# Altium PCB ElectromagneticPositioning.PcbDoc (part 2 of 3)
Units mm, origin at the board's own origin, x right, y up, seen from the top; angles counter-clockwise.
Board outline 163.96 x 78.23 mm, 2 copper layers (Top Layer, Bottom Layer); 269 components, 166 nets, 989 pads, 249 vias.
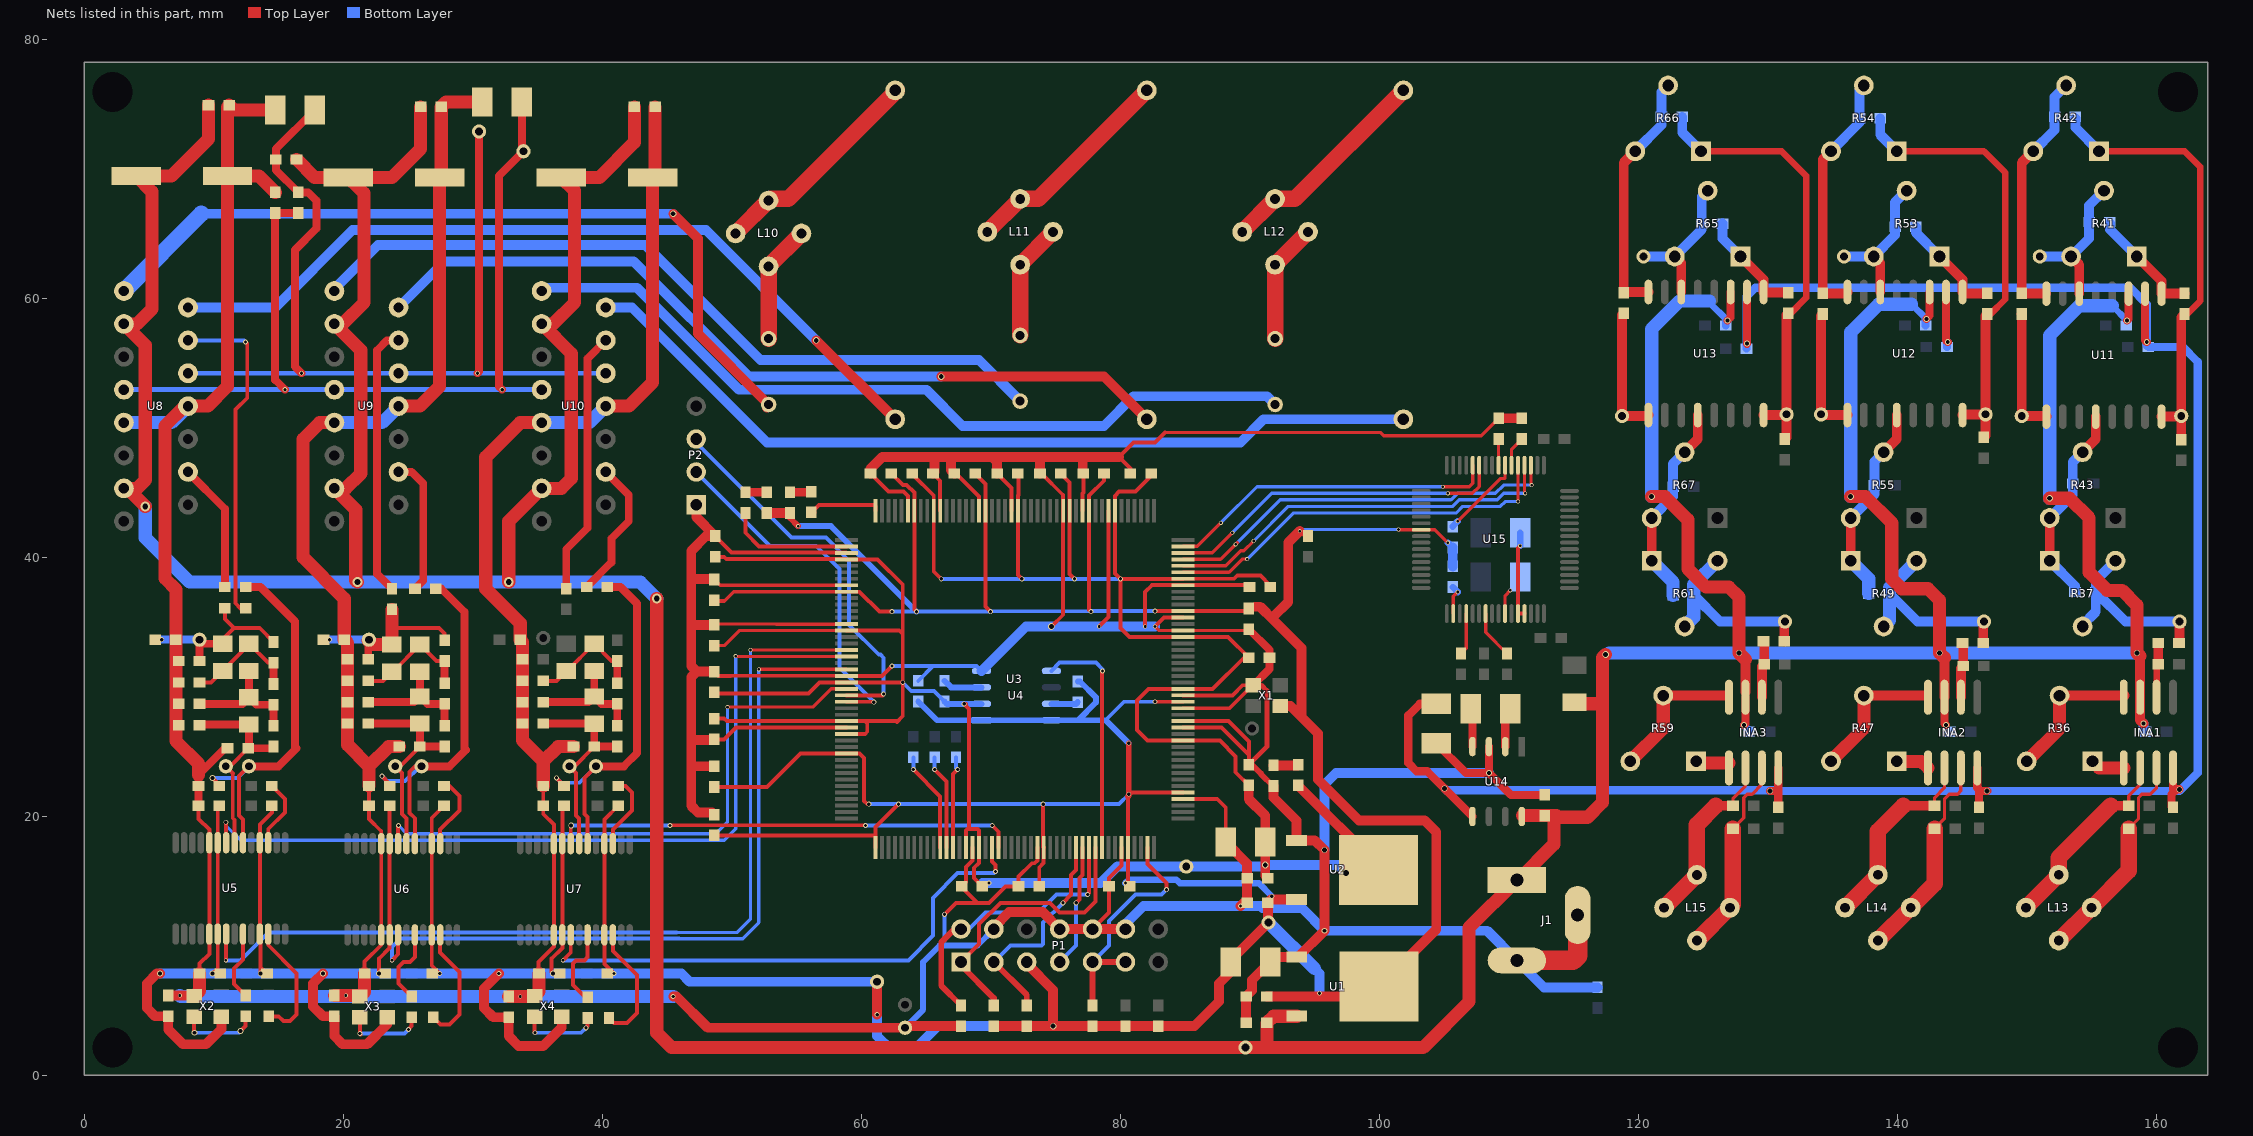
[diagram p2: the nets of this part, all layers, seen from the top]

## Via types
v1: diameter 0.305, hole 0.203, Top Layer to Bottom Layer, 111 vias
v2: diameter 0.381, hole 0.254, Top Layer to Bottom Layer, 76 vias
v3: diameter 0.457, hole 0.305, Top Layer to Bottom Layer, 34 vias
v4: diameter 0.508, hole 0.381, Top Layer to Bottom Layer, 14 vias
v5: diameter 0.457, hole 0.381, Top Layer to Bottom Layer, 8 vias
v6: diameter 0.762, hole 0.457, Top Layer to Bottom Layer, 4 vias
v7: diameter 0.508, hole 0.457, Top Layer to Bottom Layer, 1 vias
v8: diameter 0.559, hole 0.381, Top Layer to Bottom Layer, 1 vias

## Nets (pads, with @x,y where several pads share a name; then routed paths per layer and width w, separated by ;. In a path a pad name is that pad's centre, name@x,y a point inside that pad or via, vN(x,y) a via of type N, cw(c..) or ccw(c..) an arc to the next point about the centre after c; other vN are vias at no path point) (continued)
GND: C1.1 C2.1 C3.2 C4.1 C5.1 C6.2 C7.1 C8.1 C9.1 C10.1 C11.1 C12.1 C13.1 C14.1 C15.1 C16.1 C17.1 C18.1 C19.1 C20.1 C21.1 C22.1 C23.1 C24.1 C25.1 C26.1 C27.1 C30.1 C31.1 C36.1 C37.1 C40.1 C41.1 C42.1 C43.1 C44.1 C49.1 C50.1 C53.1 C54.1 C55.1 C56.1 C57.2 C62.1 C63.1 C66.1 C67.1 C68.1 C69.1 C71.1 C74.2 C78.1 C79.2 C80.2 C81.2 C84.1 C87.2 C112.2 C123.1 D1.2 J1.2 J1.3 P1.4 P1.8 P1.10 P1.12 P2.1 R2.2 R13.1 R15.2 R17.1 R18.1 R20.2 R22.1 R23.1 R25.2 R27.1 R28.1 R31.1 R71.1 R73.1 TP4.1 U1.1 U2.1 U3.3 U3.8 U3.14 U3.22 U3.30 U3.60 U3.70 U3.83 U3.92 U3.103 U3.104 U3.106 U3.108 U3.118 U3.120 U3.125 U3.140 U3.144 U3.147 U3.155 U3.160 U3.166 U3.171 U4.4 U5.5 U5.24 U6.5 U6.24 U7.5 U7.24 U8.8 U8.9 U9.8 U9.9 U10.8 U10.9 U14.3 X1.2 X2.2 X3.2 X4.2 | length 771.5
  Top Layer w0.254: C13.1@48.641,34.798 48.703,34.86 53.393,34.86 53.405,34.849 58.825,34.849 U3.14@58.836,34.86 ; C23.1@48.641,38.303 49.084,37.86 U3.8@58.836,37.86 ; 49.91,30.86 U3.22@58.836,30.86 ; v1(82.677,34.671) 82.988,34.36 U3.118@84.836,34.36 89.808,34.36 C19.1@89.916,34.468 ; 83.439,49.657 100.076,49.657 100.33,49.403 107.874,49.403 R73.1@109.22,50.749
  Top Layer w0.305: X2.2@8.437,6.172 X2.2@8.475,6.134 ; C36.1@8.814,20.828 8.814,19.812 9.644,18.982 U5.24@9.644,17.972 9.644,9.39 ; C37.1@8.89,7.874 8.89,8.636 9.644,9.39 ; U5.5@9.644,10.922 9.644,9.39 ; C50.1@21.641,7.874 21.641,8.814 22.92,10.093 U6.5@22.92,10.857 U6.24@22.92,17.907 22.92,18.863 21.971,19.812 C49.1@21.971,20.828 R20.2@21.971,22.352 ; C63.1@35.103,7.874 35.052,7.925 35.052,8.763 36.255,9.966 U7.5@36.255,10.857 U7.24@36.255,17.907 36.255,19.371 35.433,20.193 C62.1@35.433,20.828 R25.2@35.433,22.352 ; C11.1@48.641,25.959 49.403,25.959 50.304,26.86 U3.30@58.836,26.86 ; C12.1@48.641,31.191 48.971,30.861 49.911,30.861 49.91,30.86 ; C14.1@48.704,41.656 49.983,40.377 58.819,40.377 U3.3@58.836,40.36 ; U3.22@58.836,30.86 61.594,30.86 v2(62.357,31.623) ; C27.1@60.706,46.482 62.103,45.085 63.246,45.085 63.586,44.745 U3.171@63.586,43.61 ; C18.1@65.532,46.482 66.086,45.928 U3.166@66.086,43.61 ; v2(66.421,12.446) 67.31,13.335 68.961,13.335 ; C26.1@67.183,46.482 67.183,46.355 67.434,46.355 69.086,44.703 U3.160@69.086,43.61 ; U3.60@68.586,17.61 68.569,17.593 68.569,16.587 68.072,16.09 68.072,14.935 C10.1@67.742,14.605 67.742,14.554 68.961,13.335 ; C17.1@70.485,46.482 71.586,45.381 U3.155@71.586,43.61 ; U3.70@73.586,17.61 73.586,16.604 73.373,16.391 73.16,16.391 72.136,15.367 C22.1@72.136,14.605 71.12,14.605 69.85,13.335 68.961,13.335 ; C16.1@73.787,46.482 73.914,46.482 75.586,44.81 U3.147@75.586,43.61 75.586,35.581 v4(74.676,34.671) ; U3.144@77.086,43.61 77.086,44.955 77.14,45.009 C25.1@77.14,46.482 ; P1.10@77.851,11.303 79.121,12.573 C24.1@79.121,14.605 79.121,15.24 80.086,16.205 U3.83@80.086,17.61 ; v1(78.359,34.671) 79.086,35.398 U3.140@79.086,43.61 ; C15.1@80.772,46.482 80.772,46.863 79.883,47.752 81.026,48.895 82.677,48.895 83.439,49.657 ; v1(81.915,34.671) 81.915,37.338 82.437,37.86 U3.125@84.836,37.86 89.826,37.86 C9.1@89.967,37.719 ; v1(82.677,34.671) 83.366,35.36 U3.120@84.836,35.36 ; U3.92@84.836,21.36 87.479,21.36 88.136,20.703 C6.2@88.136,18.034 ; U3.103@84.836,26.86 87.821,26.86 89.916,24.765 ; U3.104@84.836,27.36 88.337,27.36 89.916,25.781 89.916,24.765 ; U3.106@84.836,28.36 88.431,28.36 X1.2@90.208,30.137 ; U3.108@84.836,29.36 88.666,29.36 89.443,30.137 X1.2@90.208,30.137 ; C8.1@89.916,24.003 89.916,24.765 ; X1.2@90.263,30.137 X1.2@90.208,30.137
  Top Layer w0.381: C8.1@89.916,24.003 91.313,25.4 91.313,29.718 90.894,30.137 X1.2@90.263,30.137
  Top Layer w0.457: C8.1@89.916,24.003 90.17,24.003 90.862,23.311 90.862,23.271 91.781,22.352 D1.2@91.821,22.352
  Top Layer w0.61: C36.1@8.814,20.828 R15.2@8.814,22.352 8.814,23.228 10.859,25.273 R17.1@11.049,25.273 ; C19.1@89.916,34.468 91.516,32.868 C7.1@91.516,32.258 91.516,31.39 X1.2@90.263,30.137
  Top Layer w0.635: C123.1@104.394,25.654 106.68,23.368 v3(108.458,23.368) ; U14.3@108.458,25.4 v3(108.458,23.368) ; C112.2@112.776,21.666 110.16,21.666 v3(108.458,23.368)
  Top Layer w0.762: C31.1@6.477,6.172 v1(7.366,6.172) X2.2@8.437,6.172 ; v2(45.466,6.096) 45.72,6.096 48.133,3.683 TP4.1@63.373,3.683 63.5,3.81 R13.1@67.691,3.81 ; P2.1@47.244,44.069 47.244,43.116 C14.1@48.704,41.656 48.006,41.656 46.863,40.513 46.863,38.354 ; C20.1@48.641,20.142 48.463,20.32 47.371,20.32 46.863,20.828 46.863,24.003 ; C21.1@48.641,23.876 46.99,23.876 46.863,24.003 ; C11.1@48.641,25.959 48.59,25.908 46.863,25.908 ; C12.1@48.641,31.191 47.295,31.191 ; C13.1@48.641,34.798 46.863,34.798 ; C23.1@48.641,38.303 48.59,38.354 46.863,38.354 ; C27.1@60.706,46.482 60.706,46.85 61.608,47.752 65.659,47.752 ; C18.1@65.532,46.482 65.659,46.609 65.659,47.752 ; C26.1@67.183,46.482 66.929,46.736 66.929,47.752 ; P1.4@70.231,11.303 70.231,11.43 71.413,12.612 74.002,12.612 P1.8@75.311,11.303 P1.10@77.851,11.303 P1.12@80.391,11.303 P1.12@80.569,11.481 ; C17.1@70.485,46.482 70.485,47.371 70.104,47.752 ; C16.1@73.787,46.482 73.787,47.752 ; C25.1@77.14,46.482 77.089,46.533 77.089,47.752 ; 79.883,47.752 77.089,47.752 ; C6.2@88.136,18.034 89.789,16.381 C5.1@89.789,15.24 C4.1@89.789,13.335 89.535,13.335 v2(89.281,13.081) ; C1.1@89.713,4.064 C2.1@89.713,6.096 90.17,6.553 90.17,7.366 C3.2@91.567,8.763 91.942,9.138 U1.1@93.617,9.138 93.72,9.138 v3(95.758,11.176) v5(95.758,17.399) 94.996,18.161 94.984,18.149 U2.1@93.599,18.149 93.599,19.685 91.821,21.463 D1.2@91.821,22.352 ; R73.1@109.22,50.749 R71.1@110.998,50.749 ; 46.863,24.003 46.863,25.908 ; 46.863,25.908 46.863,30.759 47.295,31.191 ; 46.863,34.798 46.863,31.623 47.295,31.191 ; 46.863,34.798 46.863,38.354 ; 65.659,47.752 66.929,47.752 ; 66.929,47.752 70.104,47.752 ; 70.104,47.752 73.787,47.752 ; 73.787,47.752 77.089,47.752
  Top Layer w1.016: X2.2@8.475,6.134 8.89,6.549 C37.1@8.89,7.874 ; 8.814,23.228 8.814,24.079 7.061,25.832 R18.1@7.061,33.655 7.061,37.541 6.223,38.379 6.223,50.165 7.747,51.689 U8.8@8.001,51.689 9.525,51.689 11.049,53.213 C74.2@11.049,69.469 ; C80.2@14.73,74.549 11.557,74.549 C71.1@11.176,74.93 11.049,74.803 C74.2@11.049,69.469 ; R31.1@14.732,68.199 13.462,69.469 C74.2@11.049,69.469 ; C44.1@19.304,6.172 v1(20.193,6.172) 21.192,6.172 X3.2@21.268,6.096 21.641,6.469 C50.1@21.641,7.874 ; U9.9@19.304,50.419 18.161,50.419 16.891,49.149 16.891,40.005 20.066,36.83 R23.1@20.066,33.655 20.32,33.401 C56.1@20.32,32.131 C55.1@20.32,30.48 C54.1@20.32,28.829 C53.1@20.32,27.178 20.32,25.527 21.971,23.876 ; R20.2@21.971,22.352 21.971,23.876 ; U9.8@24.257,51.689 25.908,51.689 27.432,53.213 C81.2@27.432,69.342 27.559,69.469 C78.1@27.559,74.803 27.94,75.184 C79.2@30.732,75.184 ; R22.1@24.308,25.4 23.495,25.4 21.971,23.876 ; C57.2@32.766,6.096 v1(33.655,6.096) 34.726,6.096 X4.2@34.764,6.134 35.103,6.473 C63.1@35.103,7.874 ; U10.9@35.306,50.419 33.655,50.419 30.988,47.752 30.988,37.592 33.655,34.925 R28.1@33.655,33.655 33.833,33.477 C69.1@33.833,32.131 C68.1@33.833,30.48 C67.1@33.833,28.829 C66.1@33.833,27.178 33.833,25.857 35.433,24.257 ; R25.2@35.433,22.352 35.433,24.257 ; R27.1@37.77,25.4 36.576,25.4 35.433,24.257 ; U10.8@40.259,51.689 42.037,51.689 43.881,53.533 C87.2@43.881,69.342 44.069,69.53 C84.1@44.069,74.803
  Top Layer w1.524: J1.2@110.617,8.89 114.935,8.89 115.317,9.272 J1.3@115.317,12.39
  Bottom Layer w0.305: v2(62.357,31.623) 65.532,31.623 ; C30.1@64.389,30.48 65.532,31.623 ; 66.04,10.033 66.421,10.414 v2(66.421,12.446) ; U4.4@69.276,31.242 68.895,31.623 65.532,31.623
  Bottom Layer w0.457: TP4.1@63.373,3.683 64.77,5.08 64.77,8.763 66.04,10.033 68.961,10.033 P1.4@70.231,11.303
  Bottom Layer w0.762: U4.4@69.276,31.242 72.705,34.671 v4(74.676,34.671) v1(78.359,34.671) v1(81.915,34.671) v1(82.677,34.671) ; P1.12@80.391,11.303 80.391,11.684 81.788,13.081 v2(89.281,13.081) 90.82,13.081 90.981,12.92 94.014,12.92 v3(95.758,11.176) 108.331,11.176 J1.2@110.617,8.89 112.7,6.807 R2.2@116.84,6.807 ; v5(95.758,17.399) 95.758,22.479 96.647,23.368 v3(108.458,23.368)
  Bottom Layer w1.016: U8.9@3.048,50.419 6.731,50.419 U8.8@8.001,51.689 ; v1(7.366,6.172) 7.442,6.096 v1(33.655,6.096) v2(45.466,6.096) ; U9.9@19.304,50.419 22.987,50.419 U9.8@24.257,51.689 ; U10.9@35.306,50.419 38.989,50.419 U10.8@40.259,51.689
GPIO_LED1: D3.2 U3.2 | length 9.7
  Top Layer w0.305: D3.2@51.054,43.434 51.054,41.91 52.104,40.86 U3.2@58.836,40.86
GPIO_LED2: D2.2 U3.176 | length 5.8
  Top Layer w0.305: D2.2@56.385,43.485 D2.2@56.134,43.485 56.718,44.069 60.96,44.069 61.086,43.943 U3.176@61.086,43.61
IN1_A: C70.2 U8.4 | length 26
  Top Layer w0.305: C70.2@12.446,36.068 12.065,36.068 11.666,36.467 11.666,51.417 12.573,52.324 12.573,56.515 v2(12.446,56.642)
  Bottom Layer w0.305: U8.4@8.001,56.769 12.319,56.769 v2(12.446,56.642)
IN1_B: C76.2 U9.4 | length 20.9
  Top Layer w0.61: C76.2@23.749,37.592 22.606,38.735 22.606,56.007 23.368,56.769 U9.4@24.257,56.769
IN1_C: C82.2 U10.4 | length 20.4
  Top Layer w0.61: C82.2@37.211,37.592 37.211,40.64 38.862,42.291 38.862,55.372 U10.4@40.259,56.769
IN2_A: C75.2 U8.12 | length 10.1
  Top Layer w0.61: U8.12@8.001,46.609 10.846,43.764 C75.2@10.846,37.719
IN2_B: C77.2 U9.12 | length 10.7
  Top Layer w0.61: U9.12@24.257,46.609 25.273,46.609 26.162,45.72 26.162,38.227 C77.2@25.527,37.592
IN2_C: C83.2 U10.12 | length 11
  Top Layer w0.61: C83.2@38.786,37.719 40.691,39.624 40.691,41.453 42.037,42.799 42.037,44.831 U10.12@40.259,46.609
L1_A: INA1.2 L13.2 R39.2 | length 15.3
  Top Layer w0.254: R39.2@157.861,20.828 157.861,21.59 158.75,22.479 INA1.2@158.75,23.749
  Top Layer w0.762: 156.464,20.828 R39.2@157.861,20.828
  Top Layer w1.27: L13.2@149.924,12.958 L13.2@152.464,15.498 152.464,16.828 156.464,20.828
L1_B: INA1.3 L13.1 R40.2 | length 17
  Top Layer w0.254: R40.2@157.861,19.05 158.623,19.812 158.623,21.463 158.877,21.717 159.512,21.717 160.02,22.225 INA1.3@160.02,23.749 INA1.3@160.14,23.629
  Top Layer w1.27: L13.1@152.464,10.418 L13.1@155.004,12.958 157.861,15.815 R40.2@157.861,19.05
L2_A: INA2.2 L14.2 R51.2 | length 15.4
  Top Layer w0.254: R51.2@142.875,20.828 142.875,21.463 143.637,22.225 INA2.2@143.637,23.749
  Top Layer w0.762: 140.462,20.828 R51.2@142.875,20.828
  Top Layer w1.27: L14.2@135.954,12.958 L14.2@138.494,15.498 138.494,18.86 140.462,20.828
L2_B: INA2.3 L14.1 R52.2 | length 16.4
  Top Layer w0.254: R52.2@142.875,19.05 143.637,19.812 143.637,21.336 144.018,21.717 144.653,21.717 144.907,21.971 INA2.3@144.907,23.749
  Top Layer w1.27: L14.1@138.494,10.418 L14.1@141.034,12.958 142.875,14.799 R52.2@142.875,19.05
L3_A: INA3.2 L15.2 R63.2 | length 14.2
  Top Layer w0.254: R63.2@127.305,20.828 127.305,21.387 128.27,22.352 INA3.2@128.27,23.749
  Top Layer w0.762: 125.984,20.828 R63.2@127.305,20.828
  Top Layer w1.27: L15.2@121.984,12.954 L15.2@124.524,15.494 124.524,19.368 125.984,20.828
L3_B: INA3.3 L15.1 R64.2 | length 15.6
  Top Layer w0.254: R64.2@127.305,19.05 128.143,19.888 128.143,21.463 128.397,21.717 128.778,21.717 129.54,22.479 INA3.3@129.54,23.749
  Top Layer w1.27: L15.1@124.524,10.414 L15.1@127.064,12.954 127.305,13.195 R64.2@127.305,19.05
MUTE: C80.1 R29.2 R30.1 TP28.1 U8.6 U9.6 U10.6 | length 75.2
  Top Layer w0.61: v2(16.764,54.229) 16.256,54.737 16.256,63.754 17.907,65.405 17.907,67.564 17.272,68.199 R30.1@16.51,68.199 14.783,69.926 R29.2@14.783,70.739 14.783,71.552 C80.1@17.78,74.549 ; v2(30.353,54.229) 30.48,54.356 TP28.1@30.48,72.898
  Bottom Layer w0.381: U8.6@8.001,54.229 v2(16.764,54.229) U9.6@24.257,54.229 v2(30.353,54.229) U10.6@40.259,54.229
NetC28_1: C28.1 U3.56 | length 7.3
  Top Layer w0.305: v2(65.659,23.622) 66.586,22.695 U3.56@66.586,17.61
  Bottom Layer w0.305: v2(65.659,23.622) C28.1@65.659,24.562
NetC29_1: C29.1 U3.55 | length 7.8
  Top Layer w0.305: v2(64.008,23.622) 66.086,21.544 U3.55@66.086,17.61
  Bottom Layer w0.305: v2(64.008,23.622) C29.1@64.008,24.562
NetC32_2: C32.2 C33.1 C41.2 L1.2 L2.1 | length 9.8
  Top Layer w0.61: C41.2@8.89,28.702 12.192,28.702 L1.2@12.7,29.21 ; L2.1@12.7,31.242 L1.2@12.7,29.21 ; C32.2@14.605,27 C33.1@14.605,28.626 13.284,28.626 L1.2@12.7,29.21
NetC33_2: C33.2 C34.1 C42.2 L2.2 L3.1 | length 9.3
  Top Layer w0.305: C42.2@8.89,30.353 9.779,30.353 L3.1@10.668,31.242 12.7,33.274 L2.2@12.7,33.342 14.165,31.877 C34.1@14.605,31.877
  Top Layer w0.61: C33.2@14.605,30.226 C34.1@14.605,31.877
NetC35_1: C35.1 U5.17 | length 5.3
  Top Layer w0.305: U5.17@14.194,17.972 14.194,19.02 15.494,20.32 15.494,21.336 C35.1@14.478,22.352
NetC45_2: C45.2 C46.1 C54.2 L4.2 L5.1 | length 9.9
  Top Layer w0.61: C54.2@21.92,28.829 25.459,28.829 L4.2@25.908,29.278 ; L5.1@25.908,31.174 L4.2@25.908,29.278 ; C45.2@27.813,27 C46.1@27.813,28.702 26.484,28.702 L4.2@25.908,29.278
NetC46_2: C46.2 C47.1 C55.2 L5.2 L6.1 | length 9.3
  Top Layer w0.305: C55.2@21.92,30.48 23.055,30.48 L6.1@23.749,31.174 23.808,31.174 L5.2@25.908,33.274 27.178,32.004 C47.1@27.813,32.004
  Top Layer w0.61: C46.2@27.813,30.302 C47.1@27.813,32.004
NetC48_1: C48.1 U6.17 | length 5.8
  Top Layer w0.305: U6.17@27.47,17.907 27.47,18.992 28.956,20.478 28.956,21.59 28.194,22.352 C48.1@27.762,22.352
NetC58_2: C58.2 C59.1 C67.2 L7.2 L8.1 | length 9.8
  Top Layer w0.61: C67.2@35.433,28.829 38.93,28.829 L7.2@39.37,29.269 ; L8.1@39.37,31.242 L7.2@39.37,29.269 ; C58.2@41.148,27 C59.1@41.148,28.702 39.937,28.702 L7.2@39.37,29.269
NetC59_2: C59.2 C60.1 C68.2 L8.2 L9.1 | length 9.2
  Top Layer w0.305: C68.2@35.433,30.48 36.449,30.48 L9.1@37.211,31.242 37.27,31.242 L8.2@39.37,33.342 40.708,32.004 C60.1@41.148,32.004
  Top Layer w0.61: C59.2@41.148,30.302 C60.1@41.148,32.004
NetC61_2: C61.2 U7.17 | length 5.8
  Top Layer w0.305: U7.17@40.805,17.907 40.805,18.992 42.291,20.478 42.291,21.844 41.783,22.352 C61.2@41.224,22.352
NetC88_2: C88.2 L10.2 | length 9.2
  Top Layer w1.27: C88.2@52.832,56.896 L10.2@52.832,62.484 L10.2@55.372,65.024
NetC89_2: C89.2 L11.2 | length 9.1
  Top Layer w1.27: C89.2@72.263,57.15 L11.2@72.263,62.611 L11.2@74.803,65.151
NetC90_2: C90.2 L12.2 | length 9.3
  Top Layer w1.27: C90.2@91.948,56.896 L12.2@91.948,62.611 L12.2@94.488,65.151
NetC93_1: C93.1 TP34.1 U11.1 | length 10.2
  Top Layer w0.305: C93.1@149.352,58.801 C93.1@149.606,58.547
  Top Layer w0.762: C93.1@149.606,58.801 149.606,58.547 TP34.1@149.606,50.927 151.46,50.927 U11.1@151.511,50.876
NetC93_2: C93.2 R42.2 R42.3 R45.2 U11.16 | length 19.4
  Top Layer w0.305: U11.16@151.486,60.401 U11.16@151.511,60.376
  Top Layer w0.762: R42.3@150.495,71.374 149.606,70.485 C93.2@149.606,60.401 U11.16@151.486,60.401
  Bottom Layer w0.762: R42.3@150.495,71.374 152.146,73.025 R45.2@152.146,74.041 152.146,75.565 R42.2@153.035,76.454
NetC94_1: C94.1 INA1.6 R38.2 | length 4.4
  Top Layer w0.508: INA1.6@160.02,29.21 R38.2@160.02,32.004
  Top Layer w0.762: R38.2@160.147,31.75 C94.1@160.147,33.401
NetC96_1: C96.1 R41.1 R44.1 U11.9 | length 8.9
  Top Layer w0.762: R41.1@158.496,63.246 160.401,61.341 U11.9@160.401,60.376 160.426,60.401 C96.1@162.179,60.401
  Bottom Layer w0.762: R44.1@156.413,65.786 156.413,65.329 R41.1@158.496,63.246
NetC96_2: C96.2 C97.1 R42.1 R45.1 TP35.1 U11.8 | length 35
  Top Layer w0.508: R42.1@155.575,71.374 162.179,71.374 163.398,70.155 163.398,59.817 162.382,58.801 C96.2@162.179,58.801
  Top Layer w0.762: U11.8@160.401,50.876 161.874,50.876 TP35.1@161.925,50.927 ; C97.1@161.925,49.098 TP35.1@161.925,50.927 ; C96.2@162.179,58.801 161.925,58.547 TP35.1@161.925,50.927
  Bottom Layer w0.762: R45.1@153.746,73.914 153.746,73.203 R42.1@155.575,71.374
NetC100_1: C100.1 TP38.1 U12.1 | length 9.9
  Top Layer w0.762: C100.1@134.239,58.801 134.112,58.674 TP38.1@134.112,51.054 134.163,51.003 U12.1@136.144,51.003
NetC100_2: C100.2 R54.2 R54.3 R57.2 U12.16 | length 19.3
  Top Layer w0.762: R54.3@134.874,71.374 134.239,70.739 C100.2@134.239,60.401 136.042,60.401 U12.16@136.144,60.503
  Bottom Layer w0.762: R54.3@134.874,71.374 137.084,73.584 R57.2@137.084,73.914 137.084,76.124 R54.2@137.414,76.454
NetC101_1: C101.1 INA2.6 R50.2 | length 4.3
  Top Layer w0.762: INA2.6@144.907,29.21 144.907,31.445 R50.2@145.085,31.623 145.085,33.35 C101.1@145.034,33.401
NetC103_1: C103.1 R53.1 R56.1 U12.9 | length 8.5
  Top Layer w0.762: R53.1@143.256,63.246 145.034,61.468 U12.9@145.034,60.503 145.136,60.401 C103.1@146.939,60.401
  Bottom Layer w0.762: R56.1@141.427,65.532 141.427,65.075 R53.1@143.256,63.246
NetC103_2: C103.2 C104.1 R54.1 R57.1 TP39.1 U12.8 | length 35.2
  Top Layer w0.508: R54.1@139.954,71.374 146.685,71.374 148.336,69.723 148.336,59.944 147.193,58.801 C103.2@146.939,58.801
  Top Layer w0.762: U12.8@145.034,51.003 145.085,51.054 TP39.1@146.812,51.054 ; C104.1@146.685,49.276 146.812,49.403 TP39.1@146.812,51.054 ; C103.2@146.939,58.801 146.812,58.674 TP39.1@146.812,51.054
  Bottom Layer w0.762: R57.1@138.684,73.914 138.684,72.644 R54.1@139.954,71.374
NetC107_1: C107.1 TP42.1 U13.1 | length 10
  Top Layer w0.762: C107.1@118.872,58.852 118.745,58.725 TP42.1@118.745,50.927 120.701,50.927 U13.1@120.777,51.003
NetC107_2: C107.2 R66.2 R66.3 R69.2 U13.16 | length 19.3
  Top Layer w0.762: R66.3@119.761,71.374 118.872,70.485 C107.2@118.872,60.452 118.923,60.503 U13.16@120.777,60.503
  Bottom Layer w0.762: R66.3@119.761,71.374 121.793,73.406 R69.2@121.793,74.041 121.793,75.946 R66.2@122.301,76.454
NetC108_1: C108.1 INA3.6 R62.2 | length 4.4
  Top Layer w0.762: INA3.6@129.54,29.21 129.54,31.572 R62.2@129.718,31.75 129.718,33.477 C108.1@129.667,33.528
NetC110_1: C110.1 R65.1 R68.1 U13.9 | length 8.5
  Top Layer w0.762: R65.1@127.889,63.246 129.667,61.468 U13.9@129.667,60.503 129.718,60.452 C110.1@131.572,60.452
  Bottom Layer w0.762: R68.1@126.492,65.786 126.492,64.643 R65.1@127.889,63.246
NetC110_2: C110.2 C111.1 R66.1 R69.1 TP43.1 U13.8 | length 35.1
  Top Layer w0.508: R66.1@124.841,71.374 131.064,71.374 132.969,69.469 132.969,60.071 131.75,58.852 C110.2@131.572,58.852
  Top Layer w0.762: U13.8@129.667,51.003 131.394,51.003 TP43.1@131.445,51.054 ; C111.1@131.318,49.149 131.445,49.276 TP43.1@131.445,51.054 ; C110.2@131.572,58.852 131.445,58.725 TP43.1@131.445,51.054
  Bottom Layer w0.762: R69.1@123.393,74.041 123.393,72.822 R66.1@124.841,71.374
NetC119_1: C119.1 U14.2 | length 3.1
  Top Layer w0.635: U14.2@109.728,25.4 109.728,27.938 C119.1@110.111,28.321
NetC119_2: C119.2 U14.4 | length 3
  Top Layer w0.635: C119.2@107.061,28.321 107.188,28.194 U14.4@107.188,25.4
NetC129_1: C129.1 U15.44 U15.45 | length 6.8
  Top Layer w0.305: v1(110.871,40.894) 110.706,40.729 U15.44@110.706,35.673 U15.45@111.206,35.673
  Bottom Layer w0.508: v1(110.871,40.894) C129.1@110.871,41.91
NetC130_1: C130.1 U15.42 | length 2
  Top Layer w0.254: U15.42@109.706,35.673 109.706,37.062 v1(110.109,37.465)
NetC132_2: C132.2 U15.39 | length 3.8
  Top Layer w0.254: U15.39@108.206,35.673 108.206,34.237 C132.2@109.855,32.588
NetC133_2: C133.2 U15.36 | length 3.3
  Top Layer w0.254: C133.2@106.299,32.588 106.706,32.995 U15.36@106.706,35.673
NetD1_1: D1.1 R1.1 | length 1.9
  Top Layer w0.762: D1.1@91.821,23.952 93.675,23.952 R1.1@93.726,24.003
NetD2_1: D2.1 R8.2 | length 1.7
  Top Layer w0.635: R8.2@54.483,45.034 56.083,45.034 D2.1@56.134,45.085
NetD3_1: D3.1 R9.2 | length 1.7
  Top Layer w0.635: D3.1@51.054,45.034 R9.2@52.705,45.034
NetINA1_1: INA1.1 R36.1 | length 2.6
  Top Layer w1.016: R36.1@155.067,24.257 155.575,23.749 INA1.1@157.48,23.749
NetINA1_8: INA1.8 R36.2 R36.3 | length 11.3
  Top Layer w0.762: R36.2@152.527,29.337 INA1.8@157.556,29.337
  Top Layer w1.016: R36.3@149.987,24.257 152.527,26.797 R36.2@152.527,29.337
  Bottom Layer w0.635: R36.2@152.527,29.337 R36.2@152.654,29.21
NetINA2_1: INA2.1 R47.1 | length 2.6
  Top Layer w1.016: R47.1@139.954,24.257 141.859,24.257 INA2.1@142.367,23.749
NetINA2_8: INA2.8 R47.2 R47.3 | length 11
  Top Layer w0.762: R47.2@137.414,29.337 INA2.8@142.24,29.337
  Top Layer w1.016: R47.3@134.874,24.257 137.414,26.797 R47.2@137.414,29.337
NetINA3_1: INA3.1 R59.1 | length 2.6
  Top Layer w1.016: R59.1@124.46,24.257 124.587,24.13 INA3.1@127,24.13
NetINA3_8: INA3.8 R59.2 R59.3 | length 11.1
  Top Layer w0.762: R59.2@121.92,29.337 INA3.8@126.873,29.337
  Top Layer w1.016: R59.3@119.38,24.257 121.92,26.797 R59.2@121.92,29.337
NetL10_1: L10.1 R32.2 | length 16.8
  Top Layer w1.27: L10.1@50.419,65.151 L10.1@52.832,67.564 52.959,67.691 54.356,67.691 R32.2@62.738,76.073
NetL11_1: L11.1 R33.2 | length 16.8
  Top Layer w1.27: L11.1@69.723,65.151 L11.1@72.263,67.691 73.66,67.691 R33.2@82.042,76.073
NetL12_1: L12.1 R34.2 | length 17
  Top Layer w1.27: L12.1@89.408,65.151 L12.1@91.948,67.691 93.472,67.691 R34.2@101.854,76.073
NetR3_2: R3.2 U3.57 | length 7.1
  Top Layer w0.305: U3.57@67.086,17.61 67.086,23.271 v2(67.437,23.622)
  Bottom Layer w0.305: R3.2@67.31,24.562 67.31,23.749 v2(67.437,23.622)
NetR4_1: R4.1 U4.3 | length 3.1
  Bottom Layer w0.457: R4.1@66.421,30.48 66.929,29.972 U4.3@69.276,29.972
NetR5_1: R5.1 U4.7 | length 2.1
  Bottom Layer w0.457: U4.7@74.676,28.702 76.581,28.702 R5.1@76.708,28.829
NetR14_1: R14.1 U5.9 | length 5.4
  Top Layer w0.305: U5.9@12.244,10.922 12.244,8.938 11.557,8.251 11.557,7.061 R14.1@12.446,6.172
NetR14_2: R14.2 X2.3 | length 6.2
  Top Layer w0.305: X2.3@8.475,4.534 8.475,3.336 v3(8.509,3.302) ; v3(12.065,3.429) 12.446,3.81 R14.2@12.446,4.572
  Bottom Layer w0.305: v3(8.509,3.302) 11.938,3.302 v3(12.065,3.429)
NetR16_2: R16.2 U5.12 | length 9.7
  Top Layer w0.305: U5.12@14.194,10.922 14.194,10.063 16.383,7.874 16.383,4.699 15.875,4.191 15.367,4.191 14.986,4.572 R16.2@14.224,4.572
NetR19_1: R19.1 U6.9 | length 6
  Top Layer w0.305: R19.1@25.273,6.096 24.257,7.112 24.257,8.382 24.638,8.763 25.146,8.763 25.146,8.777 25.52,9.151 U6.9@25.52,10.857
NetR19_2: R19.2 X3.3 | length 6.3
  Top Layer w0.305: X3.3@21.268,4.496 v2(21.268,3.243) v2@21.336,3.175 ; v2(25.019,3.556) 25.273,3.81 R19.2@25.273,4.496
  Bottom Layer w0.305: v2(21.268,3.243) 24.706,3.243 v2(25.019,3.556)
NetR21_2: R21.2 U6.12 | length 9.4
  Top Layer w0.305: R21.2@26.924,4.496 27.483,3.937 28.194,3.937 28.956,4.699 28.956,8.001 27.47,9.487 U6.12@27.47,10.857
NetR24_1: R24.1 U7.9 | length 6.2
  Top Layer w0.305: U7.9@38.855,10.857 38.855,9.137 38.608,8.89 37.973,8.89 37.719,8.636 37.719,6.985 38.659,6.045 R24.1@38.862,6.045
NetR24_2: R24.2 X4.3 | length 6.2
  Top Layer w0.305: X4.3@34.764,4.534 34.764,3.336 v2(34.798,3.302) ; v2(38.735,3.683) 38.862,3.81 R24.2@38.862,4.445
  Bottom Layer w0.305: v2(34.798,3.302) 38.354,3.302 v2(38.735,3.683)
NetR26_2: R26.2 U7.12 | length 9.4
  Top Layer w0.305: R26.2@40.513,4.445 40.894,4.064 41.91,4.064 42.672,4.826 42.672,7.747 40.805,9.614 U7.12@40.805,10.857
NetR35_2: R35.2 R37.1 R43.2 R43.3 R46.2 U11.4 | length 15.8
  Top Layer w0.762: R37.1@151.765,39.751 R43.3@151.765,43.053 ; R43.2@154.305,48.133 155.321,49.149 U11.4@155.321,50.876
  Bottom Layer w0.762: R37.1@151.765,39.751 153.721,37.795 R35.2@153.721,37.338 ; R43.3@151.765,43.053 153.543,44.831 R46.2@153.543,45.72 153.543,47.371 R43.2@154.305,48.133
NetR41_2: R41.2 R41.3 R44.2 TP33.1 U11.14 | length 11.7
  Top Layer w0.762: R41.3@153.416,63.246 154.051,62.611 U11.14@154.051,60.376
  Bottom Layer w0.762: TP33.1@151.003,63.246 R41.3@153.416,63.246 154.813,64.643 R44.2@154.813,65.913 154.813,67.183 R41.2@155.956,68.326
NetR48_2: R48.2 R49.1 R55.2 R55.3 R58.2 U12.4 | length 15.8
  Top Layer w0.762: R49.1@136.398,39.751 R55.3@136.398,43.053 ; R55.2@138.938,48.133 139.954,49.149 U12.4@139.954,51.003
  Bottom Layer w0.762: R55.3@136.398,43.053 138.227,44.882 R58.2@138.227,45.593 138.227,47.422 R55.2@138.938,48.133
  Bottom Layer w1.016: R49.1@136.398,39.751 137.795,38.354 R48.2@137.795,37.211
NetR53_2: R53.2 R53.3 R56.2 TP37.1 U12.14 | length 11.4
  Top Layer w0.762: R53.3@138.176,63.246 138.684,62.738 U12.14@138.684,60.503
  Bottom Layer w0.762: TP37.1@135.89,63.246 R53.3@138.176,63.246 139.827,64.897 R56.2@139.827,65.532 139.827,67.437 R53.2@140.716,68.326
NetR60_2: R60.2 R61.1 R67.2 R67.3 R70.2 U13.4 | length 16.1
  Top Layer w0.762: R61.1@121.031,39.751 R67.3@121.031,43.053 ; R67.2@123.571,48.133 124.587,49.149 U13.4@124.587,51.003
  Bottom Layer w0.762: R67.3@121.031,43.053 122.682,44.704 R70.2@122.682,45.466 122.682,47.244 R67.2@123.571,48.133
  Bottom Layer w1.016: R61.1@121.031,39.751 122.682,38.1 R60.2@122.682,37.084
NetR65_2: R65.2 R65.3 R68.2 TP41.1 U13.14 | length 11.5
  Top Layer w0.762: R65.3@122.809,63.246 123.317,62.738 U13.14@123.317,60.503
  Bottom Layer w0.762: TP41.1@120.396,63.246 R65.3@122.809,63.246 124.892,65.329 R68.2@124.892,65.786 124.892,67.869 R65.2@125.349,68.326
NetR71_2: R71.2 U15.6 | length 2.4
  Top Layer w0.254: U15.6@110.206,47.123 110.206,48.357 R71.2@110.998,49.149
NetR72_2: R72.2 U15.7 | length 6.6
  Top Layer w0.254: v1(106.045,42.799) 109.339,46.093 109.643,46.093 109.706,46.156 U15.7@109.706,47.123
  Bottom Layer w0.508: R72.2@105.664,42.367 105.664,42.418 v1(106.045,42.799)
NetR73_2: R73.2 U15.8 | length 2.1
  Top Layer w0.254: U15.8@109.22,47.137 U15.8@109.206,47.123 109.206,49.135 R73.2@109.22,49.149
NetR74_1: R74.1 U15.34 | length 2.3
  Top Layer w0.254: U15.34@105.706,35.673 105.706,36.999 v1(106.045,37.338)
  Bottom Layer w0.508: R74.1@105.664,37.719 v1(106.045,37.338)
OA_OUT_A: C94.2 R35.1 R37.2 R37.3 TP32.1 | length 15.2
  Top Layer w0.762: C94.2@161.747,33.401 161.798,33.452 TP32.1@161.798,35.052
  Bottom Layer w0.762: R37.2@154.305,34.671 154.305,34.798 155.321,35.814 R35.1@155.321,37.338 ; R37.3@156.845,39.751 155.321,38.227 R35.1@155.321,37.338 ; TP32.1@161.798,35.052 157.607,35.052 R35.1@155.321,37.338
OA_OUT_B: C101.2 R48.1 R49.2 R49.3 TP36.1 | length 16
  Top Layer w0.762: C101.2@146.634,33.401 146.634,35.001 TP36.1@146.685,35.052
  Bottom Layer w0.762: R48.1@139.395,37.211 141.554,35.052 TP36.1@146.685,35.052
  Bottom Layer w1.016: R49.2@138.938,34.671 139.395,35.128 R48.1@139.395,37.211 139.395,37.668 R49.3@141.478,39.751
OA_OUT_C: C108.2 R60.1 R61.2 R61.3 TP40.1 | length 15.6
  Top Layer w0.762: C108.2@131.267,33.528 131.267,35.001 TP40.1@131.318,35.052
  Bottom Layer w0.762: R60.1@124.282,37.084 126.314,35.052 TP40.1@131.318,35.052
  Bottom Layer w1.016: R61.2@123.571,34.671 124.282,35.382 R60.1@124.282,37.084 124.282,37.922 R61.3@126.111,39.751
OS0: U3.129 U15.3 | length 31
  Top Layer w0.254: U3.129@84.836,39.86 87.739,39.86 v1(88.9,41.021) 89.027,41.148 ; U15.3@111.706,47.123 111.706,45.647 v1(111.76,45.593)
  Bottom Layer w0.254: v1(88.9,41.021) 92.329,44.45 105.537,44.45 106.045,44.958 108.966,44.958 109.601,45.593 v1(111.76,45.593)
OS1: U3.128 U15.4 | length 30.9
  Top Layer w0.254: U3.128@84.836,39.36 88.128,39.36 89.281,40.513 89.535,40.513 v1(90.297,41.275) ; U15.4@111.206,47.123 111.206,45.004 v1(111.252,44.958)
  Bottom Layer w0.254: v1(90.297,41.275) 92.964,43.942 105.664,43.942 106.172,44.45 109.093,44.45 109.601,44.958 v1(111.252,44.958)
OS2: U3.127 U15.5 | length 30.9
  Top Layer w0.254: U3.127@84.836,38.86 88.39,38.86 89.408,39.878 v1(89.789,39.878) ; v1(110.706,44.323) U15.5@110.706,47.123
  Bottom Layer w0.254: v1(89.789,39.878) 93.345,43.434 105.918,43.434 106.426,43.942 109.347,43.942 109.728,44.323 v1(110.706,44.323)
OUT+_A: R32.1 U8.2 | length 63.1
  Top Layer w0.762: v4(56.515,56.769) R32.1@62.611,50.673
  Bottom Layer w0.762: U8.2@8.001,59.309 14.732,59.309 20.701,65.278 48.006,65.278 v4(56.515,56.769)
OUT+_B: R33.1 U9.2 | length 64.3
  Top Layer w0.762: v4(66.167,53.975) 78.74,53.975 R33.1@82.042,50.673
  Bottom Layer w0.762: U9.2@24.257,59.309 27.813,62.865 42.418,62.865 51.308,53.975 v4(66.167,53.975)
OUT+_C: R34.1 U10.2 | length 66.6
  Bottom Layer w0.762: U10.2@40.259,59.309 42.291,59.309 52.705,48.895 89.281,48.895 91.059,50.673 R34.1@101.854,50.673
OUT-_A: C88.1 U8.1 | length 62.9
  Top Layer w0.762: v4(45.466,66.548) 47.371,64.643 47.371,57.277 52.705,51.943 C88.1@52.705,51.562
  Bottom Layer w0.762: 9.017,66.548 v4(45.466,66.548)
  Bottom Layer w1.27: U8.1@3.048,60.579 9.017,66.548
OUT-_B: C89.1 U9.1 | length 59.5
  Bottom Layer w0.762: U9.1@19.304,60.579 19.304,60.757 22.682,64.135 43.307,64.135 52.197,55.245 69.088,55.245 C89.1@72.263,52.07
OUT-_C: C90.1 U10.1 | length 62.4
  Bottom Layer w0.762: U10.1@35.306,60.579 35.306,60.63 35.509,60.833 42.672,60.833 50.546,52.959 65.024,52.959 67.818,50.165 78.74,50.165 81.026,52.451 91.313,52.451 C90.1@91.948,51.816
RD: U3.131 U15.12 | length 25.8
  Top Layer w0.254: U3.131@84.836,40.86 85.945,40.86 v1(87.757,42.672) ; v1(104.902,45.466) 106.934,45.466 107.206,45.738 U15.12@107.206,47.123
  Bottom Layer w0.254: v1(87.757,42.672) 90.551,45.466 v1(104.902,45.466)
RESET: U3.130 U15.11 | length 26.6
  Top Layer w0.254: U3.130@84.836,40.36 87.096,40.36 v1(88.646,41.91) ; v1(105.283,44.958) 107.188,44.958 107.706,45.476 U15.11@107.706,47.123
  Bottom Layer w0.254: v1(88.646,41.91) 91.694,44.958 v1(105.283,44.958)
RESET_A: U3.19 U5.22 | length 64
  Top Layer w0.254: v1(50.292,32.385) 50.317,32.36 U3.19@58.836,32.36
  Top Layer w0.305: v2(10.922,19.558) 10.944,19.536 U5.22@10.944,17.972
  Bottom Layer w0.254: v2(10.922,19.558) 10.922,19.304 12.065,18.161 49.403,18.161 50.292,19.05 v1(50.292,32.385)
RESET_B: U3.24 U6.22 | length 46.1
  Top Layer w0.254: v1(49.657,28.448) 56.261,28.448 57.673,29.86 U3.24@58.836,29.86
  Top Layer w0.305: U6.22@24.22,17.907 24.22,19.267 v2(24.257,19.304)
  Bottom Layer w0.254: v2(24.257,19.304) 24.892,18.669 48.768,18.669 49.657,19.558 v1(49.657,28.448)
RESET_C: U3.64 U7.22 | length 35.8
  Top Layer w0.305: U7.22@37.555,17.907 37.555,19.267 v3(37.592,19.304) ; v2(45.212,19.304) 45.23,19.322 60.307,19.322 v2(60.325,19.304) ; v2(70.104,19.304) 70.586,18.822 U3.64@70.586,17.61
  Bottom Layer w0.305: v3(37.592,19.304) v2(45.212,19.304) ; v2(60.325,19.304) v2(70.104,19.304)
REST: U3.80 U4.5 | length 18.2
  Top Layer w0.305: U3.80@78.586,17.61 78.586,31.215 v2(78.613,31.242)
  Bottom Layer w0.305: U4.5@74.676,31.242 75.311,31.877 78.105,31.877 78.613,31.369 v2(78.613,31.242)
RXD: P2.2 U3.26 | length 27.7
  Top Layer w0.305: U3.26@58.836,28.86 v2@60.991,28.86
  Bottom Layer w0.305: P2.2@47.244,46.609 52.959,40.894 56.515,40.894 58.293,39.116 58.293,31.496 v2(60.96,28.829)
ST-BY: C79.1 R30.2 R31.2 TP29.1 U8.7 U9.7 U10.7 | length 71.2
  Top Layer w0.61: v2(15.494,52.959) 14.732,53.721 R31.2@14.732,66.599 R30.2@16.51,66.599 ; v2(32.258,52.959) 32.004,53.213 32.004,69.469 TP29.1@33.909,71.374 33.782,71.501 C79.1@33.782,75.184
  Bottom Layer w0.381: U8.7@3.048,52.959 v2(15.494,52.959) U9.7@19.304,52.959 v2(32.258,52.959) U10.7@35.306,52.959
TCK: P1.9 P1.11 R10.2 U3.87 | length 18.9
  Top Layer w0.305: U3.87@82.086,17.61 82.086,16.339 83.549,14.876 83.549,14.797 83.566,14.779 v2(83.566,14.351)
  Top Layer w0.457: R10.2@77.851,5.41 P1.9@77.851,8.763 P1.11@80.391,8.763
  Bottom Layer w0.305: P1.9@77.851,8.763 79.121,10.033 79.121,11.938 81.153,13.97 83.185,13.97 v2(83.566,14.351)
TDI: P1.3 R7.2 U3.76 | length 17.3
  Top Layer w0.305: v2(75.565,13.335) 76.2,13.97 76.2,15.494 76.566,15.86 76.566,17.59 U3.76@76.586,17.61
  Top Layer w0.457: P1.3@70.231,8.763 72.771,6.223 R7.2@72.771,5.41
  Bottom Layer w0.305: P1.3@70.231,8.763 71.501,10.033 73.914,10.033 74.041,10.16 74.041,11.811 v2(75.565,13.335)
TDO: P1.7 U3.77 | length 9.6
  Top Layer w0.305: v2(76.581,13.335) 76.835,13.589 76.835,15.24 77.086,15.491 U3.77@77.086,17.61
  Bottom Layer w0.305: P1.7@75.311,8.763 76.581,10.033 v2(76.581,13.335)
TMS: P1.1 R6.2 U3.79 | length 22.4
  Top Layer w0.305: P1.1@67.691,8.763 69.088,10.16 69.088,11.688 70.735,13.335 74.549,13.335 75.311,12.573 77.216,12.573 78.086,13.443 U3.79@78.086,17.61
  Top Layer w0.457: P1.1@67.691,8.763 67.691,8.509 70.231,5.969 R6.2@70.231,5.41
TRSTN: P1.2 R13.2 U3.78 | length 22
  Top Layer w0.305: v2(77.47,13.97) 77.586,14.086 U3.78@77.586,17.61
  Top Layer w0.457: R13.2@67.691,5.41 66.167,6.934 66.167,10.287 67.183,11.303 P1.2@67.691,11.303
  Bottom Layer w0.305: P1.2@67.691,11.303 68.326,11.303 69.596,12.573 73.66,12.573 75.057,13.97 v2(77.47,13.97)
TXD: P2.3 U3.25 | length 30.2
  Top Layer w0.305: U3.25@58.836,29.36 61.618,29.36 v2(61.722,29.464)
  Bottom Layer w0.305: P2.3@47.244,49.149 47.244,48.895 54.61,41.529 57.277,41.529 59.055,39.751 59.055,34.798 61.341,32.512 61.468,32.512 61.722,32.258 v2(61.722,29.464)
V_OUT_N_A: C75.1 R15.1 TP9.1 U5.20 | length 29.4
  Top Layer w0.305: v3(9.906,22.987) 10.414,22.479 R15.1@10.414,22.352 ; U5.20@12.244,17.972 12.244,19.76 11.938,20.066 11.938,23.114 TP9.1@12.7,23.876
  Top Layer w0.61: C75.1@12.446,37.719 13.589,37.719 16.256,35.052 16.256,25.4 16.383,25.273 14.986,23.876 TP9.1@12.7,23.876
  Bottom Layer w0.305: v3(9.906,22.987) 11.811,22.987 TP9.1@12.7,23.876
V_OUT_N_B: C77.1 R20.1 TP12.1 U6.20 | length 29.1
  Top Layer w0.305: v2(22.987,23.114) 23.571,22.53 R20.1@23.571,22.352 ; U6.20@25.52,17.907 25.52,19.866 25.106,20.28 25.106,23.455 25.527,23.876 TP12.1@26.035,23.876
  Top Layer w0.61: TP12.1@26.035,23.876 28.194,23.876 29.464,25.146 29.337,25.273 29.337,35.814 27.559,37.592 C77.1@27.127,37.592
  Bottom Layer w0.305: v2(22.987,23.114) 23.368,22.733 24.765,22.733 25.908,23.876 TP12.1@26.035,23.876
V_OUT_N_C: C83.1 R25.1 TP15.1 U7.20 | length 29
  Top Layer w0.305: v2(36.449,22.987) 37.033,22.403 R25.1@37.033,22.352 ; U7.20@38.855,17.907 38.855,19.946 38.608,20.193 38.608,22.987 TP15.1@39.497,23.876
  Top Layer w0.61: TP15.1@39.497,23.876 41.656,23.876 42.672,24.892 42.672,36.449 41.402,37.719 C83.1@40.386,37.719
  Bottom Layer w0.305: v2(36.449,22.987) 36.83,22.606 38.227,22.606 TP15.1@39.497,23.876
V_OUT_P_A: C32.1 C40.2 L1.1 R17.2 TP10.1 U5.21 | length 16.5
  Top Layer w0.305: U5.21@11.594,17.972 11.594,19.728 11.455,19.866 11.455,23.314 11.47,23.328 TP10.1@10.922,23.876 11.252,23.876 R17.2@12.649,25.273 ; C32.1@14.308,25.4 C32.1@14.605,25.4
  Top Layer w0.61: C40.2@8.89,27.051 8.949,27.11 L1.1@12.7,27.11 12.7,25.324 R17.2@12.649,25.273 14.478,25.273 C32.1@14.605,25.4
V_OUT_P_B: C45.1 C53.2 L4.1 R22.2 TP13.1 U6.21 | length 16.5
  Top Layer w0.305: U6.21@24.87,17.907 24.87,19.834 24.511,20.193 24.511,23.368 TP13.1@24.003,23.876 24.384,23.876 R22.2@25.908,25.4
  Top Layer w0.61: C53.2@21.92,27.178 L4.1@25.908,27.178 R22.2@25.908,25.4 C45.1@27.813,25.4
V_OUT_P_C: C58.1 C66.2 L7.1 R27.2 TP16.1 U7.21 | length 16.3
  Top Layer w0.305: U7.21@38.205,17.907 38.205,19.834 37.973,20.066 37.973,23.368 TP16.1@37.465,23.876 37.846,23.876 R27.2@39.37,25.4
  Top Layer w0.61: C66.2@35.433,27.178 39.361,27.178 L7.1@39.37,27.169 R27.2@39.37,25.4 C58.1@41.148,25.4
VCC_5V: C1.2 C71.2 C74.1 C78.2 C81.1 C84.2 C87.1 C92.1 C99.1 C106.1 C112.1 C116.2 C117.2 C118.2 INA1.7 INA2.7 INA3.7 J1.1 L16.1 R29.1 TP2.1 U1.3 U8.3 U8.13 U9.3 U9.13 U10.3 U10.13 U11.11 U12.11 U13.11 U14.8 | length 495.3
  Top Layer w0.61: v3(126.873,58.293) 127.127,58.547 U13.11@127.127,60.503 ; v3(128.143,27.051) 128.27,27.178 INA3.7@128.27,29.21 ; v3(142.24,58.42) 142.494,58.674 U12.11@142.494,60.503 ; INA2.7@143.637,29.21 143.637,27.178 v3(143.764,27.051) ; v3(157.734,58.293) 157.861,58.42 U11.11@157.861,60.376
  Top Layer w0.762: INA3.7@128.27,29.591 128.27,32.131 ; INA2.7@143.637,29.21 143.637,32.258 ; 158.75,32.385 INA1.7@158.75,29.21 158.75,27.432 v3(159.004,27.178)
  Top Layer w1.016: U8.13@3.048,45.339 U8.13@3.302,45.339 ; v6(4.699,43.942) U8.13@3.302,45.339 ; C71.2@9.576,74.93 9.576,72.314 6.731,69.469 C74.1@3.998,69.469 5.207,68.26 5.207,59.182 4.064,58.039 U8.3@3.048,58.039 4.699,56.388 4.699,45.974 4.064,45.339 U8.13@3.302,45.339 ; R29.1@16.383,70.739 17.78,69.342 C81.1@20.381,69.342 23.749,69.342 25.959,71.552 C78.2@25.959,74.803 ; U9.13@19.304,45.339 20.955,43.688 20.955,38.227 v6(21.082,38.1) ; 20.066,45.339 20.193,45.339 21.336,46.482 21.336,56.007 U9.3@19.304,58.039 19.939,58.039 21.59,59.69 21.59,68.133 C81.1@20.752,68.971 ; v6(32.766,38.1) 32.766,42.799 U10.13@35.306,45.339 35.318,45.327 36.818,45.327 37.592,46.101 37.592,55.753 U10.3@35.306,58.039 36.195,58.039 37.846,59.69 37.846,68.326 C87.1@36.83,69.342 39.751,69.342 42.469,72.06 C84.2@42.469,74.803 ; v6(44.196,36.83) 44.196,3.302 45.339,2.159 TP2.1@89.662,2.159 91.059,2.159 ; U1.3@93.617,4.578 91.827,4.578 C1.2@91.313,4.064 91.313,2.413 91.059,2.159 ; U14.8@111.064,20.066 C112.1@112.776,20.066 113.665,20.066 ; L16.1@115.062,28.829 115.189,28.702 117.221,28.702 ; v4(117.475,32.512) 117.221,32.258 117.221,28.702 ; v4(121.031,44.704) 122.047,44.704 123.825,42.926 123.825,39.116 125.222,37.719 127,37.719 127.762,36.957 v5(127.762,32.639) 128.27,32.131 ; v4(136.398,44.704) 137.541,44.704 139.573,42.672 139.573,38.354 140.335,37.592 142.367,37.592 143.256,36.703 v5(143.256,32.639) 143.637,32.258 ; v4(151.765,44.577) 153.289,44.577 154.813,43.053 154.813,38.862 156.21,37.465 157.353,37.465 158.496,36.322 v5(158.496,32.639) 158.75,32.385 ; 91.059,2.159 103.378,2.159 106.934,5.715 106.934,11.43 110.594,15.09 J1.1@110.617,15.09 110.721,15.09 113.477,17.846 113.477,19.939 116.078,19.939 117.221,21.082 117.221,28.702
  Bottom Layer w0.508: 125.476,59.817 125.476,59.69 v3(126.873,58.293) ; 141.097,59.563 v3(142.24,58.42) ; 156.591,59.436 v3(157.734,58.293)
  Bottom Layer w0.61: C118.2@126.746,57.912 126.746,58.166 v3(126.873,58.293) ; v3(128.143,27.051) 128.524,26.67 C106.1@128.524,26.543 ; C117.2@142.189,57.912 142.189,58.369 v3(142.24,58.42)
  Bottom Layer w0.762: C92.1@159.004,26.67 v3(159.004,27.178)
  Bottom Layer w1.016: v6(4.699,43.942) 4.699,41.529 8.128,38.1 v6(21.082,38.1) v6(32.766,38.1) 42.926,38.1 v6(44.196,36.83) ; 117.729,32.639 v5(127.762,32.639) v5(143.256,32.639) 158.242,32.639 ; v4(121.031,44.704) 121.031,57.658 123.19,59.817 125.476,59.817 ; v4(136.398,44.704) 136.398,57.404 138.557,59.563 141.097,59.563 ; v4(151.765,44.577) 151.765,57.15 154.051,59.436 156.591,59.436
VCC_-5V: C95.2 C102.2 C109.2 C123.2 C124.1 C125.1 C126.1 INA1.4 INA2.4 INA3.4 U11.10 U12.10 U13.10 U14.5 | length 175.2
  Top Layer w0.635: C123.2@104.394,28.704 103.126,28.704 102.235,27.813 102.235,24.13 102.87,23.495 103.693,23.495 v5(105.029,22.159) U14.5@107.188,20 ; v3(128.397,56.515) U13.10@128.397,60.503 ; v5(130.175,21.971) 130.683,21.971 130.81,22.098 ; C109.2@130.81,20.701 130.81,22.098 ; INA3.4@130.81,23.749 130.81,22.098 ; U12.10@143.764,60.503 143.764,56.769 v3(143.891,56.642) ; INA2.4@146.177,23.749 146.177,22.225 146.431,21.971 ; C102.2@146.304,20.701 146.304,21.844 146.431,21.971 ; v5(146.939,21.971) 146.431,21.971 ; U11.10@159.131,60.376 159.131,56.769 v3(159.258,56.642) ; C95.2@161.163,20.777 161.163,21.717 161.544,22.098 ; INA1.4@161.29,23.749 161.29,22.098 161.544,22.098 ; v5(161.798,22.098) 161.544,22.098
  Bottom Layer w0.635: v5(105.029,22.159) 105.156,22.032 130.937,22.032 ; C126.1@128.346,56.134 128.346,60.147 129.032,60.833 143.764,60.833 ; v5(130.175,21.971) v5(146.939,21.971) 161.671,21.971 v5(161.798,22.098) 161.798,21.971 163.195,23.368 163.195,55.118 162.052,56.261 C124.1@159.385,56.261 159.258,56.388 v3(159.258,56.642) 159.258,59.563 157.988,60.833 143.764,60.833 ; C125.1@143.84,56.261 143.84,56.591 v3(143.891,56.642) 143.764,56.769 143.764,60.833
VDD_1.8V: C5.2 C6.1 C7.2 C8.2 C9.2 C10.2 C11.2 C12.2 C13.2 C14.2 C15.2 C16.2 C17.2 C18.2 R1.2 R4.2 TP3.1 U2.4 U3.4 U3.15 U3.23 U3.29 U3.31 U3.59 U3.61 U3.101 U3.109 U3.117 U3.126 U3.139 U3.146 U3.154 U3.167 U4.2 | length 242.6
  Top Layer w0.254: C13.2@48.641,33.198 49.403,33.198 50.565,34.36 U3.15@58.836,34.36
  Top Layer w0.305: C11.2@48.641,27.559 49.403,27.559 49.602,27.36 U3.29@58.836,27.36 60.27,27.36 ; C12.2@48.641,29.591 48.717,29.515 55.931,29.515 56.776,30.36 U3.23@58.836,30.36 61.08,30.36 61.087,30.353 61.094,30.36 v2(63.192,30.36) ; C14.2@48.704,40.056 49.403,40.056 49.582,39.877 58.819,39.877 U3.4@58.836,39.86 61.232,39.86 63.192,37.9 63.192,34.09 ; U3.31@58.836,26.36 60.269,26.36 60.452,26.543 60.452,27.178 60.27,27.36 ; U3.15@58.836,34.36 62.922,34.36 63.192,34.09 ; C18.2@63.881,46.431 C18.2@63.932,46.482 ; C18.2@63.907,46.456 65.586,44.777 U3.167@65.586,43.61 65.586,38.935 v2(66.167,38.354) ; v2@68.072,28.702 v2(67.938,28.702) 68.326,28.314 68.326,19.177 68.199,19.05 ; U3.59@68.086,17.61 68.086,18.937 68.199,19.05 ; C10.2@69.342,14.605 68.707,15.24 68.707,16.043 69.075,16.411 69.075,17.599 U3.61@69.086,17.61 69.086,18.925 68.961,19.05 68.199,19.05 ; C17.2@72.085,46.482 72.136,46.431 72.136,44.831 72.086,44.781 U3.154@72.086,43.61 72.086,38.658 v2(72.39,38.354) ; C16.2@75.387,46.482 76.086,45.783 U3.146@76.086,43.61 76.086,38.722 v2(76.454,38.354) ; C15.2@82.233,46.164 81.153,45.085 79.905,45.085 79.586,44.766 U3.139@79.586,43.61 79.586,38.778 v2(80.01,38.354) ; U3.126@84.83,38.354 v2(80.01,38.354) ; U3.126@84.836,38.36 88.779,38.36 89.027,38.608 90.805,38.608 91.567,37.846 C9.2@91.567,37.719 ; C8.2@89.916,22.403 88.9,23.419 88.9,24.638 87.678,25.86 U3.101@84.836,25.86 82.09,25.86 81.28,26.67 81.28,28.956 82.184,29.86 U3.109@84.836,29.86 84.851,29.845 87.122,29.845 89.535,32.258 C7.2@89.916,32.258 88.314,33.86 U3.117@84.836,33.86 80.694,33.86 80.01,34.544 v2(80.01,38.354) ; 60.27,27.36 62.683,27.36 62.738,27.305 63.192,27.759 v2(63.192,30.36) ; v2(63.192,30.36) 63.192,34.09
  Top Layer w0.762: C8.2@89.916,22.403 89.916,21.336 91.186,20.066 C6.1@91.186,18.034 v4(91.186,16.256) 91.186,15.443 C5.2@91.389,15.24 ; R1.2@93.726,22.403 99.949,16.18 U2.4@99.949,15.869
  Bottom Layer w0.305: v2(63.192,30.36) 63.852,29.7 65.601,29.7 R4.2@66.421,28.88 ; v2@66.161,38.36 v2(66.167,38.354) v2(72.39,38.354) v2(76.454,38.354) v2(80.01,38.354)
  Bottom Layer w0.457: R4.2@66.421,28.88 66.599,28.702 v2(67.938,28.702) U4.2@69.276,28.702
  Bottom Layer w0.762: 69.342,14.859 v2(69.85,14.859) 78.486,14.859 79.756,16.129 TP3.1@85.09,16.129 91.059,16.129 v4(91.186,16.256) 96.774,16.256 v7(97.409,15.621)
VDD_3.3V: C2.2 C3.1 C4.2 C19.2 C20.2 C21.2 C22.2 C23.2 C24.2 C25.2 C26.2 C27.2 C30.2 C31.2 C36.2 C37.2 C38.2 C39.2 C44.2 C49.2 C50.2 C51.2 C52.2 C57.1 C62.2 C63.2 C64.2 C65.2 C134.2 P1.5 R5.2 R6.1 R7.1 R8.1 R9.1 R10.1 R11.1 R12.1 R72.1 R74.2 TP1.1 TP8.1 U1.4 U2.3 U3.9 U3.34 U3.45 U3.71 U3.84 U3.93 U3.107 U3.121 U3.143 U3.159 U3.170 U4.1 U4.8 U5.6 U5.11 U5.18 U5.23 U6.6 U6.11 U6.18 U6.23 U7.6 U7.11 U7.18 U7.23 U15.23 X1.4 X2.4 X3.4 X4.4 | length 518.5
  Top Layer w0.254: 49.403,36.627 50.136,37.36 U3.9@58.836,37.36 59.842,37.36 59.862,37.34 ; v1(93.853,42.037) 94.234,41.656 C134.2@94.488,41.656 ; v1(101.473,42.164) 101.489,42.148 U15.23@103.231,42.148 104.283,42.148 v1(105.283,41.148)
  Top Layer w0.305: v3(9.906,7.874) C37.2@10.294,8.262 ; C37.2@10.294,8.07 C37.2@10.49,7.874 ; U5.6@10.294,10.922 C37.2@10.294,8.262 ; C36.2@10.414,20.828 10.294,20.708 U5.23@10.294,17.972 C37.2@10.294,8.262 ; v3(13.614,7.874) 13.614,8.357 ; C39.2@14.097,7.874 13.614,8.357 ; C38.2@14.478,20.828 14.478,20.32 13.544,19.386 U5.18@13.544,17.972 U5.11@13.544,10.922 13.614,10.852 13.614,8.357 ; v3(22.733,7.874) 22.733,9.017 23.57,9.854 U6.6@23.57,10.857 U6.23@23.57,17.907 C49.2@23.571,20.828 C49.2@23.571,20.828 ; v2(27.432,7.874) 26.82,8.486 U6.11@26.82,10.857 U6.18@26.82,17.907 26.82,19.886 C51.2@27.762,20.828 ; v3(36.195,7.874) 36.068,8.001 36.068,9.017 36.905,9.854 U7.6@36.905,10.857 U7.23@36.905,17.907 36.905,20.7 C62.2@37.033,20.828 ; v2(40.894,7.874) 40.155,8.613 U7.11@40.155,10.857 U7.18@40.155,17.907 40.155,19.759 C64.2@41.224,20.828 ; C20.2@48.641,18.542 61.086,18.542 ; C21.2@48.641,22.276 52.705,22.276 55.289,24.86 U3.34@58.836,24.86 59.842,24.86 60.198,24.504 60.198,21.209 60.452,20.955 v2(60.579,20.955) ; C23.2@48.641,36.703 48.717,36.627 49.403,36.627 ; 59.862,37.34 61.388,35.814 v2(62.357,35.814) ; U3.45@61.086,17.61 61.086,18.542 ; C27.2@62.306,46.482 63.197,45.591 63.498,45.591 63.5,45.593 64.086,45.007 U3.170@64.086,43.61 64.086,35.99 v2(64.262,35.814) ; v2(62.865,20.955) 61.086,19.176 61.086,18.542 ; C26.2@68.697,46.396 C26.2@68.783,46.482 69.586,45.679 U3.159@69.586,43.61 69.586,36.205 v2(69.977,35.814) ; C22.2@73.736,14.605 73.736,16.072 74.069,16.404 74.069,17.593 U3.71@74.086,17.61 74.041,17.655 v2(74.041,20.955) ; v2(77.724,35.814) 77.586,35.952 U3.143@77.586,43.61 77.586,44.773 78.74,45.927 C25.2@78.74,46.482 ; 80.586,21.531 U3.84@80.586,17.61 80.586,15.748 80.603,15.731 80.603,14.723 C24.2@80.721,14.605 ; v2@80.645,21.59 80.915,21.86 U3.93@84.836,21.86 ; v2(82.677,28.86) U3.107@84.836,28.86 ; v2(82.677,35.86) U3.121@84.836,35.86 89.708,35.86 C19.2@89.916,36.068
  Top Layer w0.457: R8.1@54.483,43.434 54.483,43.053 v1(55.118,42.418) ; 80.586,21.531 80.645,21.59 v2(80.645,21.717) v2(80.645,25.654)
  Top Layer w0.762: v3(5.842,7.874) 5.588,7.874 4.826,7.112 4.826,5.207 5.461,4.572 C31.2@6.477,4.572 6.477,3.556 7.62,2.413 9.398,2.413 10.575,3.59 X2.4@10.575,4.534 ; 17.653,7.112 17.653,5.334 18.415,4.572 C44.2@19.304,4.572 19.304,3.048 19.939,2.413 21.844,2.413 23.368,3.937 X3.4@23.368,4.496 ; 17.78,7.239 v3(18.415,7.874) ; v2(32.004,7.874) 30.861,6.731 30.861,5.207 31.572,4.496 C57.1@32.766,4.496 32.766,3.048 33.528,2.286 35.433,2.286 36.864,3.717 X4.4@36.864,4.534 ; R9.1@52.705,43.434 R8.1@54.483,43.434 ; v2(61.214,4.699) TP8.1@61.214,7.239 ; R6.1@70.231,3.81 R7.1@72.771,3.81 v4(74.803,3.81) ; P1.5@72.771,8.763 72.771,8.636 74.803,6.604 v4(74.803,3.81) ; 90.424,36.195 90.805,36.195 91.821,35.179 ; C2.2@91.313,6.096 99.205,6.096 U1.4@99.967,6.858 104.394,11.285 104.394,18.796 103.505,19.685 98.425,19.685 95.25,22.86 95.25,26.416 93.98,27.686 ; X1.4@92.363,28.537 93.129,28.537 93.98,27.686 ; U2.3@93.599,13.589 91.643,13.589 C4.2@91.389,13.335 91.389,11.862 TP1.1@91.44,11.811 88.517,8.888 C3.1@88.517,8.763 88.517,7.999 87.63,7.112 87.63,5.715 85.725,3.81 R12.1@82.931,3.81 R11.1@80.391,3.81 R10.1@77.851,3.81 v4(74.803,3.81) ; v1(93.853,42.037) 92.964,41.148 92.964,36.576 91.821,35.433 91.821,35.179 ; 91.821,35.179 93.98,33.02 93.98,27.686
  Bottom Layer w0.254: v1(93.853,42.037) 93.98,42.164 v1(101.473,42.164)
  Bottom Layer w0.305: v2(60.579,20.955) v2(62.865,20.955) v2(74.041,20.955) 79.883,20.955 v2(80.645,21.717) ; v2(62.357,35.814) v2(64.262,35.814) 69.977,35.829 77.724,35.85 77.734,35.86 v2(82.677,35.86) ; 78.867,27.432 80.295,28.86 v2(82.677,28.86)
  Bottom Layer w0.457: v1(55.118,42.418) 57.658,42.418 v2(64.262,35.814) ; C30.2@64.389,28.88 65.837,27.432 U4.1@69.276,27.432 U4.8@74.676,27.432 76.736,27.432 ; R5.2@76.708,30.429 76.886,30.429 78.105,29.21 78.105,28.801 76.736,27.432 ; v2(80.645,25.654) 78.867,27.432 76.736,27.432
  Bottom Layer w0.508: v2(80.391,14.859) 80.645,15.113 84.328,15.113 84.582,14.859 90.678,14.859 v2(91.694,13.843) ; v1(105.283,41.148) R72.1@105.664,40.767
  Bottom Layer w0.762: v3(5.842,7.874) v3(9.906,7.874) v3(13.614,7.874) v3(18.415,7.874) v3(22.733,7.874) v2(27.432,7.874) v2(32.004,7.874) v3(36.195,7.874) v2(40.894,7.874) 46.101,7.874 46.736,7.239 TP8.1@61.214,7.239 ; v2(61.214,4.699) 61.214,3.048 62.23,2.032 64.135,2.032 65.913,3.81 v4(74.803,3.81) ; 94.996,8.255 95.377,7.874 v2(95.377,6.35) ; R74.2@105.664,39.319 R72.1@105.664,40.767
  Bottom Layer w1.016: TP1.1@91.44,11.811 94.996,8.255
W_CLK_A: U3.18 U5.7 | length 72.1
  Top Layer w0.254: v1(51.435,32.86) U3.18@58.836,32.86
  Top Layer w0.305: v1(10.922,8.89) 10.922,10.9 U5.7@10.944,10.922
  Bottom Layer w0.254: 45.72,11.049 50.419,11.049 51.435,12.065 v1(51.435,32.86)
  Bottom Layer w0.305: v1(10.922,8.89) 12.065,8.89 14.224,11.049 45.72,11.049
W_CLK_B: U3.21 U6.7 | length 58.6
  Top Layer w0.254: v1(52.079,31.36) U3.21@58.836,31.36
  Top Layer w0.305: v1(23.749,8.89) 24.22,9.361 U6.7@24.22,10.857
  Bottom Layer w0.254: 45.92,10.566 50.834,10.566 52.079,11.811 v1(52.079,31.36)
  Bottom Layer w0.305: v1(23.749,8.89) 23.749,9.906 24.409,10.566 45.92,10.566
W_CLK_C: U3.63 U7.7 | length 42.1
  Top Layer w0.305: v1(36.957,8.89) 37.555,9.488 U7.7@37.555,10.857 ; U3.63@70.086,17.61 70.086,16.528 70.358,16.256 v2(70.358,15.748)
  Bottom Layer w0.305: v1(36.957,8.89) 63.627,8.89 65.532,10.795 65.532,13.716 67.437,15.621 70.231,15.621 v2(70.358,15.748)
WAVE_A: C34.2 C43.2 C70.1 L3.2 R18.2 TP11.1 | length 13.5
  Top Layer w0.305: R18.2@5.461,33.655 R18.2@5.461,33.782 ; L3.2@10.668,33.342 10.668,33.655 11.557,34.544 ; C70.1@10.846,36.068 10.846,35.255 11.557,34.544 ; C34.2@14.605,33.477 13.538,34.544 11.557,34.544
  Top Layer w0.61: C43.2@8.89,32.004 TP11.1@8.89,33.655 9.203,33.342 L3.2@10.668,33.342
  Bottom Layer w0.61: v2(5.969,33.655) TP11.1@8.89,33.655
WAVE_B: C47.2 C56.2 C76.1 L6.2 R23.2 TP14.1 | length 14
  Top Layer w0.305: 23.749,34.544 27.385,34.544 27.813,34.116 C47.2@27.813,33.604
  Top Layer w0.61: C56.2@21.92,32.131 TP14.1@21.92,33.604
  Top Layer w1.016: TP14.1@21.92,33.604 22.25,33.274 L6.2@23.749,33.274 23.749,34.544 C76.1@23.749,35.992
  Bottom Layer w0.61: v2(18.923,33.655) TP14.1@21.971,33.655